# Altium PCB PCB1.PcbDoc (part 2 of 4)
Units mm, origin at the board's own origin, x right, y up, seen from the top; angles counter-clockwise.
Board outline 45.9 x 24.5 mm, 4 copper layers (Top Layer, Signal Layer 1, Signal Layer 2, Bottom Layer), stack 1.021 mm thick; 157 components, 126 nets, 564 pads, 199 vias.
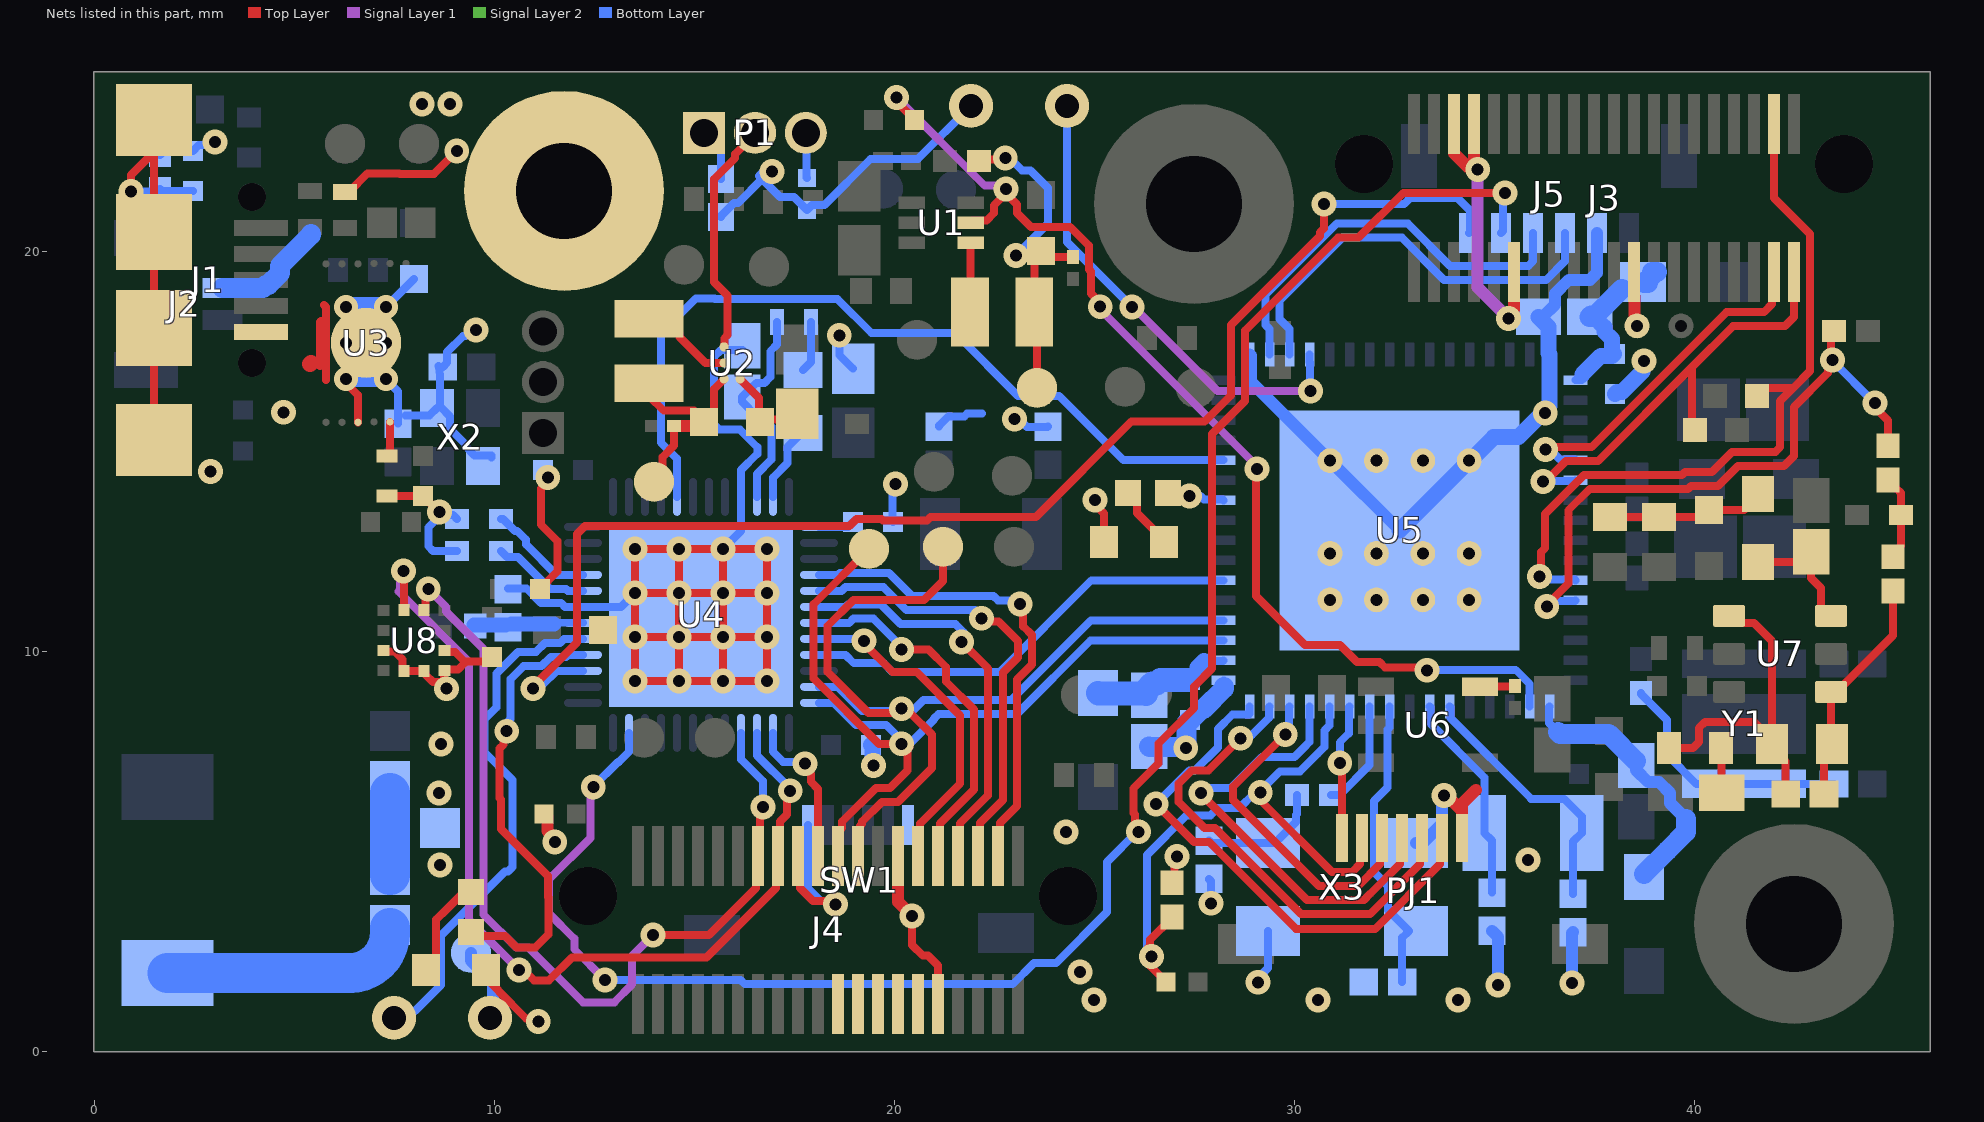
[diagram p4: the nets of this part, all layers, seen from the top]

## Part data (continued)
L3: "Inductor RF Chip Wirewound 10uH 10% 2.52MHz 0.38A 0.36Ohm DCR 0603 T/R", Case/Package=0603, DC Current=380mA, DC Resistance (DCR)=360mR, Inductance=10uH, Manufacturer=KEMET, Max DC Current=115mA, Max Operating Temperature=105°C, Min Operating Temperature=-25°C, Package Quantity=3000, Resistor Type=Ceramic, Self Resonant Frequency=32MHz, Supplier Part Number 1=3638979, Test Frequency=2.52MHz, Tolerance=10%, Category="Fixed Inductors", ComponentLink1Description=http://www.mouser.com/ds/2/212/F3115-1104303.pdf?src-supplier=Mouser, ComponentLink1URL=http://www.mouser.com/ds/2/212/F3115-1104303.pdf?src-supplier=Mouser, ComponentLink2Description=http://components.arrow.com/part/dataview/0323_00380344?src-supplier=Arrow+Europe, ComponentLink2URL=http://components.arrow.com/part/dataview/0323_00380344?src-supplier=Arrow+Europe, Depth=1mm, Height=0.8mm, Length=1.6mm, Manufacturer Part Number=L0603B100KDWFT, Military Standard=Not, Packaging="Tape and Reel", Pricing 1="5=0.45200, 50=0.25500, 250=0.24300, 500=0.20900, 1500=0.18400, 3000=0.15700, 15000=0.13700 (CHF)", RoHS=Yes, RoHS Compliant=Yes, Series=L-DWF, Shielding=Shielded, Stock 1=1725, Supplier 1=Farnell, Termination=SMD/SMT, Width=0.8mm
L4: library part CMP-2000-06595-2, "Wire Wound RF Inductor 15nH ±5% 460mA 0.16Ω 0402 (1005)", Case Code (Imperial)=0402, Case Code (Metric)=1005, Current Rating=460mA, DC Resistance (DCR)=160mR, Inductance=15nH, Max Operating Temperature=125°C, Min Operating Temperature=-55°C, Package Quantity=10000, Resistor Type=Wirewound, Self Resonant Frequency=5GHz, Test Frequency=100MHz, Tolerance=5%, Case/Package=0402, Core Material=Air, DC Current=460mA, Depth=0.7mm, Height=0.5mm, Lead Free="Lead Free", Length=1mm, Max DC Current=460mA, Military Standard=Not, Mount="Surface Mount", Packaging="Tape and Reel", Q Factor=30, Radiation Hardening=No, Shielding=Unshielded, Termination=SMD/SMT, Weight=2.8E-05oz, Width=0.02inch
L5: library part LQP15MN3N9B02D, "Inductor RF Chip Thin Film 3.9nH 0.1nH 500MHz 13Q-Factor 170mA 500mOhm DCR 0402 Paper T/R", Case Code (Imperial)=0402, Case Code (Metric)=1005, Current Rating=170mA, DC Resistance (DCR)=500mR, Inductance=3.9nH, Manufacturer=Murata, Max Operating Temperature=85°C, Min Operating Temperature=-40°C, Package Quantity=10000, Resistor Type="Thin Film", Self Resonant Frequency=6GHz, Supplier Part Number 1=490-1131-1-ND, Test Frequency=500MHz, Case/Package=0402, Category="Fixed Inductors", ComponentLink1Description=https://datasheet.ciiva.com/27054/1865137-27054329.pdf?src-supplier=Jameco, ComponentLink1URL=https://datasheet.ciiva.com/27054/1865137-27054329.pdf?src-supplier=Jameco, ComponentLink2Description=https://datasheet.ciiva.com/11799/0900766b80f155d9-11799807.pdf?src-supplier=RSComponents, ComponentLink2URL=https://datasheet.ciiva.com/11799/0900766b80f155d9-11799807.pdf?src-supplier=RSComponents, ComponentLink3Description=https://datasheet.ciiva.com/8510/l0075s0084lqp15m-8510329.pdf?src-supplier=Avnet, ComponentLink3URL=https://datasheet.ciiva.com/8510/l0075s0084lqp15m-8510329.pdf?src-supplier=Avnet, ComponentLink4Description=https://datasheet.ciiva.com/4976/product-4976732.pdf?src-supplier=Mouser, ComponentLink4URL=https://datasheet.ciiva.com/4976/product-4976732.pdf?src-supplier=Mouser, ComponentLink5Description=https://datasheet.ciiva.com/1039/l0075s0084lqp15m-1039837.pdf?src-supplier=Digi-Key, ComponentLink5URL=https://datasheet.ciiva.com/1039/l0075s0084lqp15m-1039837.pdf?src-supplier=Digi-Key, ComponentLink6Description=https://datasheet.ciiva.com/1039/l0075s0084lqp15m-1039838.pdf?src-supplier=Digi-Key, ComponentLink6URL=https://datasheet.ciiva.com/1039/l0075s0084lqp15m-1039838.pdf?src-supplier=Digi-Key, ComponentLink7Description=https://datasheet.ciiva.com/1039/l0075s0084lqp15m-1039839.pdf?src-supplier=Digi-Key, ComponentLink7URL=https://datasheet.ciiva.com/1039/l0075s0084lqp15m-1039839.pdf?src-supplier=Digi-Key, ComponentLink8Description=https://datasheet.ciiva.com/16362/l0075s0084lqp15m-16362181.pdf?src-supplier=Future+Electronics, ComponentLink8URL=https://datasheet.ciiva.com/16362/l0075s0084lqp15m-16362181.pdf?src-supplier=Future+Electronics, ComponentLink9Description=https://datasheet.ciiva.com/18230/getdatasheetpartid-153200-18230711.pdf?src-supplier=Verical, ComponentLink9URL=https://datasheet.ciiva.com/18230/getdatasheetpartid-153200-18230711.pdf?src-supplier=Verical, ComponentLink10Description=https://datasheet.ciiva.com/8510/l0075s0084lqp15m-8510975.pdf?src-supplier=Avnet, ComponentLink10URL=https://datasheet.ciiva.com/8510/l0075s0084lqp15m-8510975.pdf?src-supplier=Avnet, Core Material=Non-Magnetic, DC Current=170mA, Depth=0.6mm, Height=0.35mm, Height - Seated (Max)=0.018inch, Lead Free="Lead Free", Length=1.1mm, Manufacturer Part Number=LQP15MN3N9B02D, Max DC Current=170mA, Military Standard=Not, Mount="Surface Mount", Packaging="Tape and Reel", Pricing 1="1=0.18000, 10=0.15800, 25=0.14040, 50=0.11920, 100=0.10520, 250=0.09644, 500=0.08768, 1000=0.07365, 2500=0.06313 (USD)", Q Factor=13, Radiation Hardening=No, Rated Current-Max=170mA, RoHS=Yes, RoHS Compliant=Yes, Series=LQP15M, Shielding=Unshielded, Stock 1=22125, Supplier 1=Digi-Key, Technology="THIN FILM", Termination=SMD/SMT, Width=0.5mm
L6 L7: library part 725321dda6339637d4d059423bc1c3c, "Wire Wound RF Inductor 3.6nH ±2% 1950mA 0.03Ω 0402 (1005)"
L8 L9 L10 L11: library part CMP-0220-00032-1, "SMD EMI Suppression Ferrite Bead WE-CBF, Z = 600 Ohm", ComponentLink1Description="Manufacturer Link", ComponentLink1URL=http://www.we-online.com, ComponentLink2Description=Datasheet, ComponentLink2URL=http://www.we-online.de/katalog/media/pdf/742792040.pdf, DatasheetVersion=Dec-2005, Impedance="600 Ohm", PackageDescription="Chip Inductor, 2-Leads, Body 2.0 x 1.2 mm", PackageReference=SMD-0805, PackageVersion=2005
M1 M2 M4: library part CMP-00274-1, "M2 Hole, 2.4mm drill, 5mm landing pads, 3mm pad in middle layers, no overlay", ClassName="Mounting Hole"
NT1: library part Net_Tie
P1 P2: library part CMP-2000-06372-1, "Male Header, Pitch 1.27 mm, 1 x 3 Position, Height 4 mm, Tail Length 2.3 mm, -40 to 105 degC, RoHS, Bulk", Manufacturer=Sullins, Package Description="Male Header, Pitch 1.27 mm, 1 x 3 Position, Height 4 mm, Tail Length 2.3 mm", Standard Package=1, Catalog Drawings=S9014ESeriesTop, Category=Connectors,Interconnects, Connector Type=Header,Unshrouded, Contact Finish=Gold, Contact Finish Thickness=Flash, Contact Mating Length="0.118\"(3.00mm)", Contact Type=MalePin, Datasheet URL=http://www.sullinscorp.com/drawings/71_GRPB___1VWVN-RC,_10957-C.pdf, Datasheet Version="Rev. C, 12/2008", Dynamic Catalog=GRPB, Family=RectangularConnectors-Headers,MalePins, Manufacturer URL=http://www.sullinscorp.com/, Mating Products="S9010E-03-ND / -CONNHEADER.050\"3POSR/APCB / S9008E-03-ND / -CONNHEADER.050\"3POSPCBGOLD / S9005E-03-ND / -CONNHEADER.050\"3POSSMDGOLD", Mounting Technology=ThroughHole, Mounting Type=ThroughHole, Number of Positions=3, Number of Positions Loaded=All, Number of Rows=1, Other Names=S9014E-03, Package Reference=GRPB031VWVN-RC, Packaging=Bulk, Pitch="0.050\"(1.27mm)", Termination=Solder
PJ1: library part MOLEX_5051100892
R1 R5 R6 R8 R9 R10 R11 R13: library part CMP-26527-000038-1, "RES 0.1 OHM 1% 1/4W 0402", Case Code (Imperial)=0402, Case Code (Metric)=1005, Max Operating Temperature=155°C, Max Power Dissipation=250mW, Min Operating Temperature=-55°C, Package Quantity=1000, Resistance=0.1, Resistor Type="Thick Film", Temperature Coefficient=200ppm/°C, Tolerance=1%, Case/Package=0402, Height=0.017inch, Length=0.039inch, Mount="Surface Mount", Number of Terminations=2, Packaging="Tape and Reel", RoHS Compliant=Yes, Series=CSR, Width=0.02inch
R2 R19 R20: library part CMP-2002-05525-2, "Thick Film Chip Resistors 0402 1MΩ 0.0625W 5% 200ppm/°C", Case Code (Imperial)=0402, Case Code (Metric)=1005, Max Operating Temperature=125°C, Max Power Dissipation=63mW, Min Operating Temperature=-55°C, Package Quantity=10000, Power Rating=62.5mW, Resistance=1M, Temperature Coefficient=200ppm/°C, Tolerance=5%, Voltage Rating=50V, Case/Package=0402, Composition="Thick Film", Contact Plating=Tin, Depth=0.5mm, Height=0.016inch, Length=1mm, Military Standard=Not, Mount="Surface Mount", Number of Terminations=2, Packaging="Tape and Reel", Radiation Hardening=No, Termination=SMD/SMT, Thickness=356um, Width=0.02inch
R3: library part CMP-1011-00815-1, "499K 0.063W 1% 0402 (1005 Metric)  SMD", Case-EIA=0402, Case-Metric=1005, Power="0.063 W", Tolerance="1 %", Technology=SMT
R4: library part CMP-2002-07690-1, Manufacturer=Yageo, Resistance=453k, Part Number=RC0402FR-07453KL
R7: library part CMP-2000-06984-1, "Chip Resistor, 100 KOhm, +/- 1%, 63 mW, -55 to 155 degC, 0402 (1005 Metric), RoHS, Tape and Reel", Manufacturer=Stackpole-Electronics-Inc., Operating Temperature=-55°C~155°C, Package / Case=0402(1005Metric), Package Description="2-Pin Surface Mount Device, Body 1 x 0.5 mm", Package Reference=0402, Power (Watts)=0.063W,1/16W, Resistance (Ohms)=100k, Temperature Coefficient=±100ppm/°C, Tolerance=±1%, Category=Resistors, Composition=ThickFilm, Datasheet URL=https://www.seielect.com/Catalog/SEI-RMCF_RMCP.pdf, Datasheet Version=01/2017, Family=ChipResistor-SurfaceMount, Features=AutomotiveAEC-Q200, Manufacturer URL=https://www.seielect.com/, Mounting Technology=SurfaceMount, Number of Terminations=2, Packaging=CutTape(CT), Series=RMCF, Supplier Device Package=0402
R12: library part CMP-2002-08420-1, Manufacturer="Vishay Dale", Resistance=267k, Part Number=CRCW0402267KFKED
R14: library part CMP-2002-07364-1, Manufacturer="Yageo / Phycomp", Resistance=11.5k, Part Number=RC0402FR-0711K5L
R15 R33 R34: library part CMP-1011-00001-2, Manufacturer="Yageo / Phycomp", Resistance=0, Part Number=RC0402JR-070RL
R16 R17 R32: library part CMP-2002-01683-2, "RES 10K OHM 0.1% 1/10W 0402", Manufacturer=Vishay, Package=TNPW0402-e3, Power Rating=0.1W, Resistance=10kΩ, Temperature="-55°C to +155°C", Temperature Coefficient=25ppm/°C, Temperature Range High=+155°C, Temperature Range Low=-55°C, Tolerance=0.1%, Voltage Rating=50V, Automotive=Yes, Automotive Grade="Grade 0", Category=Res, ComponentLink2Description=Datasheet, ComponentLink2URL=http://www.vishay.com/docs/28758/tnpw_e3.pdf, Composition="Thin Film", Device Class L1="Passive Components", Device Class L2=Resistors, Device Class L3="Chip SMD Resistors", Digikey Description="RES 10K OHM 0.1% 1/10W 0402", Height=0.4mm, Ipc Land Pattern Name=RESC10050X35, Lead Free=Yes, Manufacturer Part Number=TNPW040210K0BEED, Octopart=https://octopart.com/tnpw040210k0beed-vishay-41229038, RoHS=TRUE, Series=TNPW
R18: library part CMP-26527-000102-1, "RES 0.01 OHM 1% 1/8W 0402", Case Code (Imperial)=0402, Case Code (Metric)=1005, Max Operating Temperature=170°C, Max Power Dissipation=125mW, Min Operating Temperature=-55°C, Package Quantity=1, Resistance=10m, Resistor Type="Metal Foil", Temperature Coefficient=200ppm/°C, Tolerance=1%, Case/Package=0402, Features="Moisture Resistant", Height=0.022inch, Lead Free="Lead Free", Length=0.039inch, Mount="Surface Mount", Number of Terminations=2, Packaging="Cut Tape", RoHS Compliant=Yes, Series=CSRF, Width=0.022inch
R21: library part CMP-2002-00608-4, "not mounted", Case Code (Imperial)=0402, Case Code (Metric)=1005, Max Operating Temperature=155°C, Max Power Dissipation=100mW, Min Operating Temperature=-55°C, Package Quantity=1, Resistance=NC, Temperature Coefficient=100ppm/°C, Tolerance=1%, Voltage Rating=50V, Case/Package=0402, Composition="Thick Film", Contact Plating=Tin, Depth=0.5mm, Features="Automotive AEC-Q200", Height=0.35mm, Lead Free="Lead Free", Length=1mm, Military Standard=Not, Mount="Surface Mount", Number of Pins=2, Number of Terminations=2, Packaging="Tape and Reel", Power Rating=100mW, Radiation Hardening=No, REACH SVHC="No SVHC", Termination=SMD/SMT, Voltage Rating (DC)=50V, Width=0.5mm
R23 R27: library part CMP-2002-03257-1, Manufacturer="TE Connectivity / AMP", Resistance=324, Part Number=CPF0402B324RE1
R24 R25: library part CMP-2002-08314-2, "RES Thick Film, 1MΩ, 1%, 0.063W, 100ppm/°C, 0402", Case Code (Imperial)=0402, Case Code (Metric)=1005, Max Operating Temperature=155°C, Max Power Dissipation=63mW, Min Operating Temperature=-55°C, Package Quantity=10, Resistance=1M, Temperature Coefficient=100ppm/°C, Tolerance=1%, Voltage Rating=50V, Case/Package=0402, Composition="Thick Film", Contact Plating=Tin, Depth=0.5mm, Features="Automotive AEC-Q200", Height=0.35mm, Lead Free="Lead Free", Length=1mm, Military Standard=Not, Number of Pins=2, Number of Terminations=2, Packaging="Tape and Reel", Power Rating=63mW, Radiation Hardening=No, Termination=SMD/SMT, Voltage Rating (DC)=50V, Weight=2.3E-05oz, Width=0.02inch
R26 R28: library part CMP-2002-07961-1, Manufacturer="Yageo / Phycomp", Resistance=22, Part Number=RC0402JR-0722RL
R29: library part CMP-02407-007705-1, "RES Thick Film, 47kΩ, 1%, 0.063W, 100ppm/°C, 0402", Case Code (Imperial)=0402, Case Code (Metric)=1005, Max Operating Temperature=155°C, Min Operating Temperature=-55°C, Package Quantity=10000, Power Rating=63mW, Resistance=47k, Temperature Coefficient=100ppm/°C, Tolerance=1%, Voltage Rating=50V, Case/Package=0402, Composition="Thick Film", Contact Plating=Tin, Depth=0.5mm, Height=0.35mm, Lead Free="Lead Free", Length=1mm, Military Standard=Not, Mount="Surface Mount", Number of Terminations=2, Packaging="Tape and Reel", Radiation Hardening=No, Termination=SMD/SMT, Voltage Rating (DC)=50V, Weight=2.3E-05oz, Width=0.5mm, Working Voltage=50V
R30: library part CMP-2000-04142-1, Manufacturer=Yageo, Resistance=806, Part Number=RC0603FR-07806RL
R31: library part CMP-2000-03938-1, Manufacturer=Yageo, Resistance=1.82k, Part Number=RC0603FR-071K82L
R35: library part CMP-2002-05495-2, "Thick Film Chip Resistors 0402 0Ω 0.0625W 5%", Case Code (Imperial)=0402, Case Code (Metric)=1005, Max Operating Temperature=125°C, Max Power Dissipation=63mW, Min Operating Temperature=-55°C, Package Quantity=10000, Power Rating=62.5mW, Resistance=0, Temperature Coefficient=500ppm/°C, Tolerance=5%, Voltage Rating=50V, Case/Package=0402, Composition="Thick Film", Contact Plating=Tin, Depth=0.5mm, Height=0.35mm, Length=1mm, Mount="Surface Mount", Number of Pins=2, Packaging="Tape and Reel", Radiation Hardening=No, REACH SVHC="No SVHC", Termination=SMD/SMT, Thickness=356um, Voltage Rating (DC)=50V, Width=0.5mm
R36: library part CMP-03412-013083-1, "RES SMD 24.9K OHM 1% 1/10W 0603", Approved Alternate Part Number=541-1.00HHCT-ND, Manufacturer=Yageo, Package=RC_L0603, Power=100mW, Power Rating=0.1W, Resistance=24.9k, Temperature="-55°C to +155°C", Temperature Coefficient=100ppm/°C, Temperature Range High=+155°C, Temperature Range Low=-55°C, Tolerance=1%, Voltage=75V, Automotive=No, Category=Res, ComponentLink2Description=Datasheet, ComponentLink2URL=https://www.yageo.com/upload/media/product/productsearch/datasheet/rchip/PYu-RC_Group_51_RoHS_L_10.pdf, Composition="Thick Film", Device Class L1="Passive Components", Device Class L2=Resistors, Device Class L3="Chip SMD Resistors", Digikey Description="RES SMD 24.9K OHM 1% 1/10W 0603", Footprint Url=https://www.yageo.com/upload/website/yageo_PYu-R_Mount_10_19050818_343.pdf, Height=0.55mm, Ipc Land Pattern Name=RESC16080X45, Lead Free=Yes, Manufacturer Part Number=RC0603FR-0724K9L, Mouser Description="Res Thick Film 1.6 x 0.8 mm 24.9K Ohm 1% 0.1W(1/10W) 100ppm/ C Molded SMD Paper T/R", Octopart=https://octopart.com/rc0603fr-0724k9l-yageo-1189838, RoHS=TRUE, Series=RC_L, Voltage Rating=75V
R37 R38: library part CMP-2000-00320-1, Manufacturer=YAEGO, Parameter 1=2M, Part Number=RC0603FR-072ML
R39: library part 1029c3af85768c4190bb7ad29bc67b5, "Thick Film Chip Resistors 0402 0Ω 0.0625W 5%", Case Code (Imperial)=0402, Case Code (Metric)=1005, Max Operating Temperature=125°C, Max Power Dissipation=63mW, Min Operating Temperature=-55°C, Package Quantity=10000, Power Rating=62.5mW, Resistance=0, Temperature Coefficient=500ppm/°C, Tolerance=5%, Voltage Rating=50V, Case/Package=0402, Composition="Thick Film", Contact Plating=Tin, Depth=0.5mm, Height=0.35mm, Length=1mm, Mount="Surface Mount", Number of Pins=2, Packaging="Tape and Reel", Radiation Hardening=No, REACH SVHC="No SVHC", Termination=SMD/SMT, Thickness=356um, Voltage Rating (DC)=50V, Width=0.5mm
S1 S2: "Switch", Manufacturer_Name=LITTELFUSE, Datasheet Link=https://www.ckswitches.com/media/2866/nanot.pdf, Height=1mm, Manufacturer_Part_Number=NanoT160BP
SW1: library part MOLEX_5051100692
TP1 TP2 TP3 TP4 TP5 TP6 TP7 TP8 TP9 TP10 TP11 TP12 TP13 TP14 TP15 TP16 TP17 TP18 TP19 TP20 TP21 TP22 TP23: library part CMP-0484-00002-1, "Test Point, Surface Mount, Circular, Pad Diameter 1 mm"
U1: "2.5V-5.5V input, 2-A high efficiency step-down buck converter in SOT23 and SOT563 package 6-SOT-5X3 -40 to 125", Manufacturer="Texas Instruments", Max Operating Temperature=125°C, Min Operating Temperature=-40°C, Supplier Part Number 1=296-50408-1-ND, Category="Voltage Regulators - Switching", ComponentLink1Description=http://www.ti.com/general/docs/suppproductinfo.tsp?distId=10&amp;gotoUrl=http%3A%2F%2Fwww.ti.com%2Flit%2Fgpn%2Ftlv62569&src-supplier=Digi-Key, ComponentLink1URL=http://www.ti.com/general/docs/suppproductinfo.tsp?distId=10&amp;gotoUrl=http%3A%2F%2Fwww.ti.com%2Flit%2Fgpn%2Ftlv62569&src-supplier=Digi-Key, ComponentLink2Description=http://www.ti.com/lit/ds/symlink/tlv62569.pdf?src-supplier=Digi-Key, ComponentLink2URL=http://www.ti.com/lit/ds/symlink/tlv62569.pdf?src-supplier=Digi-Key, Manufacturer Part Number=TLV62569PDRLR, Pricing 1="1=0.60000, 10=0.52500, 25=0.49280, 100=0.40230, 250=0.37364, 500=0.31800, 1000=0.26250 (USD)", RoHS=Yes, RoHS Compliant=Yes, Supplier 1=Digi-Key
U2: library part CMP-01223-1, "Switching Voltage Regulators 60-nA IQ, 1.8-V to 6.5-VIN, high-efficiency 750-mA step-down converter 6-DSBGA -40 to 125", Input Voltage="1.8 V to 6.5 V", Input Voltage MAX="6.5 V", Input Voltage MIN="1.8 V", Manufacturer="Texas Instruments", Maximum Operating Temperature="+ 125 C", Minimum Operating Temperature="- 40 C", Output Current="750 mA", Output Voltage="1.8 V to 3.3 V", Package/Case=DSBGA-6, Quiescent Current="60 nA", Switching Frequency="1.8 MHz", Brand="Texas Instruments", Factory Pack Quantity=3000, Mounting Style=SMD/SMT, Number Of Outputs="1 Output", Product Category="Switching Voltage Regulators", Product type="Switching Voltage Regulators", Series=TPS62840, Shutdown=Shutdown, Subcategory="PMIC - Power Management ICs", Supply Voltage - Min="1.8 V", Topology=Buck, Type="Step-Down Converter"
U3: "System-side Impedance Track™ battery fuel (gas) gauge 12-SON -40 to 85", Capacity=8000mAh, Manufacturer="Texas Instruments", Max Operating Temperature=85°C, Max Supply Voltage=4.5V, Min Operating Temperature=-40°C, Min Supply Voltage=2.45V, Operating Supply Current=93uA, Output Current=500uA, Output Voltage=1.8V, Package Quantity=250, Supplier Part Number 1=595-BQ27441DRZT-G1B, Category="Battery Management", ComponentLink1Description=https://datasheet.ciiva.com/46405/1795843-46405045.pdf?src-supplier=Element14, ComponentLink1URL=https://datasheet.ciiva.com/46405/1795843-46405045.pdf?src-supplier=Element14, Contact Plating=Gold, Interface=I2C, Lead Free="Lead Free", Manufacturer Part Number=BQ27441DRZT-G1B, Mount="Surface Mount", Number of Cells=1, Number of Pins=12, Packaging="Tape and Reel", Pricing 1="1=3.05000, 10=2.74000, 50=2.59000, 100=2.25000, 1000=2.12000, 10000=2.12000 (USD)", REACH SVHC="No SVHC", RoHS=Yes, RoHS Compliant=Yes, Stock 1=456, Supplier 1=Mouser
U4: library part CMP-2100-03661-1, "Multiprotocol Bluetooth Smart, ANT/ANT+ and Proprietary System-on-Chip, 2.4 GHz, 256 KB FLASH, 1.7 to 3.6 V, -40 to 85 degC, 48-Pin QFN, RoHS, Tape and Reel", Frequency=2.4GHz, Manufacturer="Nordic Semiconductor", Max Operating Temperature=85degC, Min Operating Temperature=-40degC, Package Description="48-Pin Quad Flat No-lead Package, Body 6 x 6 mm, Pitch 0.4 mm, Thermal Pad 4.6 x 4.6 mm", Package Reference=QF-48, Datasheet URL=http://infocenter.nordicsemi.com/pdf/nRF52832_PS_v1.0.pdf, Datasheet Version="Rev. 1.0, 02/2016", Lead Free=LeadFree, Manufacturer URL=http://www.nordicsemi.com/eng/Products/, Max Frequency=2.4GHz, Mount=SurfaceMount, Packaging=TapeandReel, RoHSCompliant=true
U5: "No Description Available", Mfr_Name="Texas Instruments", Copyright="Copyright (C) 2021 Ultra Librarian. All rights reserved.", Manufacturer_Part_Number=MSP430FR5043IRGCT, RefDes=RefDes, Type=DEV
U6: "No Description Available", Mfr_Name="Torex Semiconductor", Copyright="Copyright (C) 2021 Ultra Librarian. All rights reserved.", Manufacturer_Part_Number=XC8102AA01MR-G, RefDes=RefDes, Type=DEV
U7: library part CMP-0018-00480-2, "Very Low Power, Rail to Rail Out, Negative Rail In, VFB Operational Amplifier, 2.5 to 5.5 V, -40 to 125 degC, 6-pin SOT23 (DBV6), Green (RoHS & no Sb/Br)", Manufacturer="Texas Instruments", 2nd Harmonic(dBc)=85, 3rd Harmonic(dBc)=105, @ MHz=1, Acl, min stable gain(V/V)=1, BW @ Acl(MHz)=205, Code_JEDEC=MO-178, ComponentLink1Description="Manufacturer URL", ComponentLink1URL=http://www.ti.com/, ComponentLink2Description=Datasheet, ComponentLink2URL=http://www.ti.com/general/docs/lit/getliterature.tsp?genericPartNumber=OPA836&fileType=pdf, ComponentLink3Description="Package Specification", ComponentLink3URL=http://www.ti.com/litv/pdf/mpds026h, DatasheetVersion=SLOS712D, Eco-Plan="Green (RoHS & no Sb/Br)", Iib(Max)(nA)=1000, Io(Typ)(mA)=50, Iq per channel(Max)(mA)=1, Mounting Technology="Surface Mount", Number of Channels=1, PackageDescription="6-Pin Plastic Small Outline, Body 1.6 x 2.9 mm, Pitch 0.95 mm", PackageReference=DBV0006A, PackageVersion="4073253-5/K, 03/2006", PartNumber=OPA836IDBVT, Settling Time (0.1%)(Typ)(ns)=30, Slew Rate(Typ)(V/us)=560, Sub Family="Audio Operational Amplifier, High Output Current Amplifier (>=50mA), High Speed Amplifier (>=50MHz), Low Noise Amp (<=10nV/rtHz), Low Offset Voltage Amplifier (<=500uV), Low Supply Voltage Amplifier (<=2.7V)", Vio(Max)(mV)=0.4, Vn at Flatband(Typ)(nV/rtHz)=4.6, Vs(Max)(V)=5.5, Vs(Min)(V)=2.5
U8: library part CMP-12175-000008-1, "ACCEL 2-16G I2C/SPI 12LGA", Manufacturer=STMicroelectronics, Max Supply Voltage=3.7V, Min Supply Voltage=1.71V, Operating Supply Current=2-11uA, Package=LGA-12-8365767, Temperature="-40°C to +85°C", Temperature Range High=+85°C, Temperature Range Low=-40°C, Accel Axis="X+Y and Z", Accel Range=2/4/8/16g, Automotive=No, Category=IC, ComponentLink2Description=Datasheet, ComponentLink2URL=https://www.st.com/content/ccc/resource/technical/document/datasheet/group1/35/6d/04/26/27/5c/4d/7c/DM00171283/files/DM00171283.pdf/jcr:content/translations/en.DM00171283.pdf, Device Class L1=Sensors, Device Class L2="Motion Sensors", Device Class L3=Accelerometers, Digikey Description="ACCEL 2-16G I2C/SPI 12LGA", Height=1mm, Lead Free=Yes, Manufacturer Part Number=IIS2DHTR, Octopart=https://octopart.com/iis2dhtr-stmicroelectronics-58218805, RoHS=TRUE, Sensor Output=I2C,SPI
X1: library part Crys_Abracon_ABS07AIG-32_768KHZ-9-1-T_eec, "Crystal", Part Nr=ABS07AIG-32.768KHZ-9-1-T
X2: library part Crys_Seiko_Epson_Corporation_FA-128_32.0000MF10Z-AJ3_eec, "Crystal", Part Nr="FA-128 32.0000MF10Z-AJ3"
X3: "Crystal 8MHz ±30ppm (Tol) ±30ppm (Stability) 18pF FUND 100Ohm 4-Pin SMD T/R", Case/Package=SMD/SMT, ESR (Equivalent Series Resistance)=100R, Frequency=8MHz, Frequency Stability=30ppm, Load Capacitance=18pF, Manufacturer=Diodes, Max Operating Temperature=85°C, Min Operating Temperature=-40°C, Supplier Part Number 1=FY0800018CT-ND, Category=Crystals, ComponentLink1Description=http://media.digikey.com/pdf/Data%20Sheets/Pericom%20PDFs/FY0800018_VerB.pdf?src-supplier=Digi-Key, ComponentLink1URL=http://media.digikey.com/pdf/Data%20Sheets/Pericom%20PDFs/FY0800018_VerB.pdf?src-supplier=Digi-Key, Frequency Tolerance=30ppm, Height=0.043inch, Length=0.197inch, Manufacturer Part Number=FY0800018, Mount="Surface Mount", Packaging="Cut Tape", Pricing 1="1=0.80000, 10=0.70800, 50=0.66220, 100=0.58520, 500=0.55440 (USD)", RoHS=Yes, Stock 1=10869, Supplier 1=Digi-Key, Width=0.126inch
X4: "Crystal; Miniature; 3.2 x 1.5 x 0.9mm; 32.768KHZ; 9pf; 20ppm -40+85C; SMD; T/R", Case/Package=CSMD, ESR (Equivalent Series Resistance)=70kR, Frequency=32.768kHz, Frequency Stability=20ppm, Insulation Resistance=500MR, Load Capacitance=9pF, Manufacturer=Abracon, Max Operating Temperature=85°C, Min Operating Temperature=-40°C, Operating Frequency="32.768 kHz", Package Quantity=3000, Supplier Part Number 1=535-9544-1-ND, Category=Crystals, ComponentLink1Description=https://datasheet.ciiva.com/855/abs07-855948.pdf?src-supplier=Digi-Key, ComponentLink1URL=https://datasheet.ciiva.com/855/abs07-855948.pdf?src-supplier=Digi-Key, Depth=1.5mm, Frequency Tolerance=20ppm, Height=0.035inch, Lead Free="Lead Free", Length=3.2mm, Manufacturer Part Number=ABS07-32.768KHZ-9-T, Mount="Surface Mount", Number of Pins=2, Packaging="Tape and Reel", Pricing 1="1=1.36000, 10=1.30000, 50=1.27000, 100=1.08860, 500=1.05840, 1000=0.89208 (USD)", Radiation Hardening=No, REACH SVHC="No SVHC", RoHS=Yes, RoHS Compliant=Yes, Series=ABS07, Series Resistance=70kR, Stock 1=83876, Supplier 1=Digi-Key, Termination=SMD/SMT, Tolerance=20ppm, Width=1.5mm
Y1: "No Description Available", Frequency=8MHz, Mfr_Name=Abracon, Copyright="Copyright (C) 2021 Ultra Librarian. All rights reserved.", Manufacturer_Part_Number=AWSCR-8.00CV-T, RefDes=RefDes, Type=DEV

## Via types
v1: diameter 0.62, hole 0.3, Top Layer to Bottom Layer, tented both sides, 176 vias
v2: diameter 0.62, hole 0.3, Top Layer to Bottom Layer, 17 vias
v3: diameter 0.6, hole 0.3, Top Layer to Bottom Layer, 6 vias

## Nets (pads, with @x,y where several pads share a name; then routed paths per layer and width w, separated by ;. In a path a pad name is that pad's centre, name@x,y a point inside that pad or via, vN(x,y) a via of type N, cw(c..) or ccw(c..) an arc to the next point about the centre after c; other vN are vias at no path point)
ACC1_INT1: J4.15 U4.15 U8.12 | length 24.1
  Top Layer w0.2: v1(7.735,12.025) 7.75,12.01 U8.12@7.75,11.05 ; v1(10.625,2.05) 10.739,2.05 10.999,1.79 11.377,1.79 11.947,2.36 15.314,2.36 17.05,4.096 17.05,4.85 17.15,4.95 17.15,5.762 17.324,5.936 17.324,6.447 v1(17.404,6.527)
  Signal Layer 1 w0.2: v1(7.735,12.025) 7.655,11.945 7.655,11.56 7.61,11.515 9.375,9.75 9.375,3.3 v1(10.625,2.05)
  Bottom Layer w0.2: U4.15@16.575,7.975 16.575,7.41 17.404,6.581 v1(17.404,6.527)
ACC1_INT2: J4.13 U4.16 U8.11 | length 22.8
  Top Layer w0.2: U8.11@8.25,11.05 8.29,11.09 8.29,11.504 v1(8.357,11.571) ; v1(13.975,2.92) 15.374,2.92 16.55,4.096 16.55,4.85 16.65,4.95 16.65,6.051 v1(16.723,6.124)
  Signal Layer 1 w0.2: v1(8.357,11.571) 8.801,11.127 8.801,11.012 9.74,10.073 9.74,3.43 10.56,2.61 10.857,2.61 12.227,1.24 13.007,1.24 13.451,1.684 13.451,2.396 v1(13.975,2.92)
  Bottom Layer w0.2: U4.16@16.175,7.975 16.175,7.315 16.723,6.767 v1(16.723,6.124)
ANT: C17.1 L5.1 U4.30 | length 3.9
  Bottom Layer w0.184: C17.1@10.286,10.675 C17.1@10.35,10.611 10.439,10.7 C17.1@10.464,10.725
  Bottom Layer w0.193: C17.1@10.464,10.725 U4.30@12.225,10.725
  Bottom Layer w0.372: L5.1@9.5,10.675 C17.1@10.286,10.675 ; C17.1@10.439,10.7 11.5,10.7
AVCC1: C24.1 C27.2 L8.2 U5.1 | length 6.9
  Bottom Layer w0.2: U5.1@36.39,8.64 36.375,8.625 36.375,8.225 36.6,8
  Bottom Layer w0.3: C24.1@38.55,7.156 38.55,7.047 38.856,6.741 39.13,6.741 39.401,6.47 39.401,6.22 39.8,5.821 ; L8.2@38.75,4.375 L8.2@38.75,4.45 ; 39.337,5.037 39.364,5.037
  Bottom Layer w0.5: 36.6,8 36.65,7.95 C27.2@37.125,7.95 37.866,7.95 C24.1@38.55,7.266 ; L8.2@38.75,4.45 39.337,5.037 39.8,5.5 39.8,5.821
Button_MSP: S2.1 U5.36 | length 12
  Signal Layer 1 w0.2: v1(25.95,18.625) 25.987,18.625 28.087,16.525 v1(30.41,16.525)
  Bottom Layer w0.2: S2.1@24.325,23.65 24.325,20.25 25.3,19.275 ; 25.3,19.275 v1@25.95,18.625 ; U5.36@30.39,17.44 30.39,17.25 30.4,17.24 30.4,16.535 v1(30.41,16.525)
Button_NRF: S1.1 U4.29 | length 13
  Bottom Layer w0.2: S1.1@7.5,0.85 7.672,1.022 8.022,1.022 8.675,1.675 8.675,2.907 10.275,4.506 10.348,4.506 10.465,4.624 10.465,6.793 9.757,7.501 9.757,8.307 10.063,8.613 10.063,9.462 10.596,9.995 11.045,9.995 11.275,10.225 11.655,10.225 11.755,10.325 U4.29@12.225,10.325
CH0_IN: C44.2 R33.1 U5.60 | length 15.9
  Top Layer w0.2: v1(36.32,11.133) 36.32,11.17 36.858,11.708 36.858,13.538 37.395,14.075 39.846,14.075 39.921,14.15 40.596,14.15 41.096,14.65 42.25,14.65 42.5,14.9 42.5,16.125 43.345,16.97 43.345,17.185 v1(43.46,17.3) ; v1@43.425,17.3 43.425,17.95 R33.1@43.5,18.025 ; v1(44.525,16.225) 44.525,16.111 44.85,15.786 C44.2@44.85,15.154
  Bottom Layer w0.2: v1(36.32,11.133) 36.434,11.133 36.571,11.27 37.02,11.27 U5.60@37.04,11.29 ; v1(43.46,17.3) 43.46,17.278 44.512,16.225 v1(44.525,16.225)
CH0_OUT: J3.37 R25.1 U5.59 | length 18.9
  Top Layer w0.2: v1(36.14,11.881) 36.177,11.918 36.177,12.491 36.277,12.591 36.277,13.452 36.298,13.473 37.25,14.425 39.701,14.425 39.776,14.5 40.451,14.5 40.951,15 42.033,15 42.15,15.117 42.15,16.27 42.48,16.6 ; R25.1@41.575,16.4 41.775,16.6 42.48,16.6 ; J3.37@42,23.2 42,21.35 42.9,20.45 42.9,17.02 42.48,16.6
  Bottom Layer w0.2: v1(36.14,11.881) 36.212,11.81 37.02,11.81 U5.59@37.04,11.79
CH1_IN: J3.38 U5.53 | length 8.9
  Top Layer w0.2: v1(36.289,15.056) 36.358,15.125 37.442,15.125 40.817,18.5 41.754,18.5 41.95,18.696 41.95,19.45 J3.38@42,19.5
  Bottom Layer w0.2: v1(36.289,15.056) 36.408,15.056 36.653,14.81 37.02,14.81 U5.53@37.04,14.79
CH1_OUT: J3.40 R24.1 U5.54 | length 11.5
  Top Layer w0.2: v1(36.225,14.26) 36.285,14.26 36.8,14.775 37.604,14.775 39.938,17.109 40.979,18.15 42.275,18.15 42.5,18.375 J3.40@42.5,19.5 ; 39.95,17.098 39.95,15.625 R24.1@40.025,15.55
  Bottom Layer w0.2: v1(36.225,14.26) 36.235,14.27 37.02,14.27 U5.54@37.04,14.29
CS_MSP430: U4.9 U5.22 | length 11.2
  Bottom Layer w0.2: U4.9@18.125,9.925 18.785,9.925 18.994,9.715 19.745,9.715 19.961,9.5 22.643,9.5 24.932,11.79 U5.22@28.24,11.79
CS_WOLF: J4.19 U4.14 | length 3.8
  Top Layer w0.2: v1(17.771,7.204) 17.771,7.091 17.921,6.941 17.921,6.754 18.1,6.575 J4.19@18.1,4.9
  Bottom Layer w0.2: U4.14@16.975,7.975 16.975,7.505 17.23,7.25 17.726,7.25 v1(17.771,7.204)
DataReady: U4.41 U5.28 | length 20.4
  Bottom Layer w0.2: U4.41@14.575,13.875 14.575,14.83 14.175,15.23 14.175,17.967 15.044,18.836 15.508,18.836 15.519,18.825 18.583,18.825 19.442,17.966 21.534,17.966 23.1,16.4 24.13,16.4 24.6,15.93 25.739,14.79 U5.28@28.24,14.79
DCC: L3.1 U4.47 | length 1.9
  Bottom Layer w0.2: U4.47@16.975,13.875 16.975,14.354 17.34,14.719 17.34,15.125 17.69,15.475 L3.1@17.725,15.475
DEC1: C10.1 U4.1 | length 0.9
  Bottom Layer w0.2: U4.1@18.125,13.125 18.85,13.125 C10.1@18.975,13.25
DEC2: C11.2 U4.32 | length 2.5
  Bottom Layer w0.2: C11.2@10.175,12.525 10.325,12.375 10.6,12.375 11.4,11.575 11.8,11.575 11.85,11.525 U4.32@12.225,11.525
DEC3: C12.2 U4.33 | length 2.7
  Bottom Layer w0.2: C12.2@10.175,13.325 10.225,13.325 10.525,13.025 10.579,13.025 10.8,12.804 10.8,12.69 11.565,11.925 U4.33@12.225,11.925
DEC4: C13.2 L4.2 U4.46 | length 5.4
  Bottom Layer w0.2: U4.46@16.575,13.875 16.575,14.449 16.933,14.807 16.933,15.636 16.666,15.903 16.556,15.903 16.2,16.259 C13.2@16.2,16.369 16.556,16.725 16.76,16.725 16.906,16.871 16.906,17.515 17.075,17.684 L4.2@17.075,18.25
DVCC1: C25.1 C28.2 L9.2 U5.18 | length 3.6
  Bottom Layer w0.2: 27.75,9.775 28.226,9.775 U5.18@28.24,9.789
  Bottom Layer w0.4: C28.2@27.4,9.3 27.59,9.49 27.59,9.615 27.75,9.775
  Bottom Layer w0.6: L9.2@25.1,8.975 25.117,8.958 26.283,8.958 26.3,8.941 26.3,9.05 26.456,9.206 26.566,9.206 26.659,9.3 C28.2@27.4,9.3
DVCC3: C26.1 C29.2 L10.2 U5.49 | length 4.2
  Bottom Layer w0.2: U5.49@37.04,16.791 37.187,16.791 37.207,16.811 37.207,16.938
  Bottom Layer w0.4: 37.207,16.938 37.669,17.4 37.95,17.4 38,17.45 37.95,17.5 37.95,17.816 37.756,18.009 37.756,18.119 C26.1@37.5,18.375
  Bottom Layer w0.5: C26.1@37.42,18.405 C26.1@37.391,18.375 37.5,18.375 L10.2@38.2,19.075 ; L10.2@38.725,19.25 38.75,19.225 38.85,19.225 38.85,19.3 L10.2@39.05,19.5 ; L10.2@38.95,19.5 L10.2@39.05,19.5 ; L10.2@39.075,19.5 L10.2@39.05,19.5
EN_HV: R2.1 U1.5 U5.2 | length 27.4
  Top Layer w0.2: v1(20.063,23.862) 20.063,23.762 20.45,23.375 R2.1@20.45,23.325 ; U1.5@21.915,20.725 21.97,20.78 22.309,20.78 22.495,20.966 22.495,21.156 v1@22.8,21.461 ; v1(22.8,21.575) v1@22.8,21.461 ; v1(25.154,18.629) 25.154,18.727 24.925,18.956 24.925,19.511 24.875,19.561 24.875,20.154 24.404,20.625 23.421,20.625 23.075,20.971 23.075,21.186 v1@22.8,21.461 ; v1(29.075,14.575) 29.05,14.55 29.05,11.4 30.275,10.175 31.147,10.175 31.572,9.75 32.134,9.75 32.281,9.604 33.263,9.604 v1(33.327,9.54)
  Signal Layer 1 w0.2: v1(20.063,23.862) 22.27,21.655 22.72,21.655 v1(22.8,21.575) ; v1(25.154,18.629) 25.154,18.562 29.075,14.642 v1(29.075,14.575)
  Bottom Layer w0.2: v1(33.327,9.54) 33.337,9.55 35.541,9.55 35.89,9.201 U5.2@35.89,8.64
ExtraConn_MSP_P5.0: J5.3 U5.34 | length 10.1
  Bottom Layer w0.2: U5.34@29.39,17.44 29.39,18.073 29.29,18.173 29.29,18.927 31.07,20.707 32.843,20.707 33.9,19.65 35.858,19.65 35.975,19.767 J5.3@35.975,20.475
ExtraConn_MSP_P5.1: J5.4 U5.35 | length 10.6
  Bottom Layer w0.2: U5.35@29.89,17.44 29.89,18.068 29.64,18.318 29.64,18.782 31.215,20.357 32.693,20.357 33.75,19.3 36.304,19.3 36.775,19.771 J5.4@36.775,20.475
ExtraConn_NRF_P0.20: J5.2 U4.23 | length 46
  Top Layer w0.2: v1(26.11,5.502) 26.03,5.582 26.03,5.928 25.99,5.968 25.99,6.59 26.606,7.206 26.606,7.703 27.503,8.6 27.503,9.135 27.95,9.581 27.95,15.444 28.775,16.269 28.775,18.028 31.103,20.357 31.613,20.357 32.732,21.475 v1(35.275,21.475)
  Signal Layer 1 w0.2: v1(12.481,6.623) 12.41,6.552 12.41,5.348 11.375,4.313 11.375,3.462 12.007,2.829 12.007,2.568 v1(12.775,1.8)
  Bottom Layer w0.2: v1(12.481,6.623) 12.481,6.631 13.1,7.25 13.12,7.25 13.375,7.505 U4.23@13.375,7.975 ; v1(12.775,1.8) 16.16,1.8 16.268,1.692 22.968,1.692 23.501,2.225 24.054,2.225 25.325,3.496 25.325,4.75 26.077,5.502 v1(26.11,5.502) ; J5.2@35.175,20.475 35.225,20.525 35.225,21.425 v1(35.275,21.475)
ExtraConn_NRF_P0.22: J5.1 U4.27 | length 33.7
  Top Layer w0.2: v1(10.973,9.085) 10.973,9.135 12.075,10.237 12.075,12.95 12.275,13.15 18.889,13.15 19.064,13.325 19.686,13.325 19.725,13.285 20.825,13.285 20.914,13.375 23.55,13.375 25.932,15.757 27.768,15.757 28.425,16.414 28.425,18.173 30.651,20.399 30.651,20.49 30.75,20.589 v1(30.75,21.2)
  Bottom Layer w0.2: v1(10.973,9.085) 11.053,9.165 11.205,9.165 11.565,9.525 U4.27@12.225,9.525 ; v1(30.75,21.2) 32.755,21.2 32.9,21.345 34.088,21.345 34.4,21.033 34.4,20.5 J5.1@34.375,20.475
GND: C3.2 C4.2 C5.1 C6.1 C7.2 C8.2 C9.2 C10.2 C11.1 C12.1 C13.1 C14.2 C15.2 C16.2 C17.2 C18.2 C19.1 C20.1 C21.2 C25.2 C26.2 C28.1 C29.1 C32.1 C34.1 C35.2 C37.1 C38.1 C49.2 C50.2 C51.2 D1.1 D2.1 J1.5 J2.2 J3.05 J3.07 J3.12 J3.24 J4.17 J4.22 J4.24 J4.26 J4.27 J4.28 J4.30 J4.32 J5.5 L7.2 M1.1 NT1.2 PJ1.2 R12.1 R14.1 R15.2 R17.1 R21.2 S1.2 S2.2 SW1.1 SW1.6 TP23.1 U2.A1 U3.3 U3.13 U4.31 U4.45 U4.49 U5.17 U5.33 U5.48 U5.65 U8.3 U8.5 U8.6 U8.7 U8.8 X2.2 X2.4 X3.2 X3.4 | length 192.1
  Top Layer w0.2: 5.65,17.15 5.65,18.25 5.675,18.275 ; 5.75,18.675 5.8,18.625 5.8,16.8 ; R17.1@6.275,21.5 6.375,21.5 6.84,21.965 7.63,21.965 7.645,21.95 8.495,21.95 v1(9.069,22.523) ; v3(6.3,16.825) 6.3,16.717 6.6,16.417 U3.3@6.6,15.74 ; U8.3@7.237,10.038 7.271,10.004 7.521,10.004 7.717,9.808 7.717,9.558 U8.5@7.75,9.525 U8.6@8.25,9.525 8.29,9.485 8.29,9.43 8.475,9.245 v1@8.755,9.245 ; C6.1@7.325,13.9 C7.2@8.225,13.9 8.625,13.5 v1(8.635,13.5) ; U8.8@8.762,10.038 8.802,9.998 9.019,9.998 9.051,9.966 9.055,9.966 9.282,9.739 ; v1(8.815,9.08) 8.755,9.14 v1@8.755,9.245 ; D1.1@9.6,2.1 9.6,2.05 10.115,1.535 10.115,1.518 10.795,0.838 11.028,0.838 v1(11.108,0.758) ; C49.2@9.95,9.875 9.83,9.755 9.282,9.755 9.282,9.739 ; C51.2@11.15,11.575 11.583,12.008 11.583,12.774 11.177,13.18 11.177,14.079 11.345,14.246 v1(11.345,14.36) ; U2.A1@16.15,16.825 16.625,16.35 16.625,15.775 C4.2@16.65,15.75 ; C4.2@16.65,15.7 16.755,15.805 17.325,15.805 C3.2@17.575,16.055 ; J4.17@17.6,4.9 17.65,4.85 17.65,4.096 17.976,3.77 18.46,3.77 v1(18.54,3.69) ; v1(20.45,3.4) 20.45,2.675 20.719,2.406 20.852,2.406 21.1,2.158 J4.32@21.1,1.2 ; v1(25.025,13.8) 25.025,13.686 25.25,13.461 D2.1@25.25,12.75 ; C35.2@26.95,4.229 27.012,4.291 27.012,4.821 v1(27.075,4.883) ; v1@8.755,9.245 8.755,9.53 8.787,9.563 9.105,9.563 9.282,9.739 ; v2(13.525,10.375) v2(14.625,10.375) ; v2(13.525,10.375) v2(13.525,11.475) ; v2(13.525,10.375) v2(13.525,9.275) v2(14.625,9.275) ; v2(13.525,11.475) v2(14.625,11.475) ; v2(13.525,11.475) v2(13.525,12.575) v2(14.625,12.575) ; v2(14.625,9.275) v2(14.625,10.375) ; v2(14.625,9.275) v2(15.725,9.275) ; v2(14.625,10.375) v2(15.725,10.375) ; v2(14.625,10.375) v2(14.625,11.475) ; v2(14.625,11.475) v2(15.725,11.475) ; v2(14.625,11.475) v2(14.625,12.575) ; v2(14.625,12.575) v2(15.725,12.575) ; v2(15.725,9.275) v2(15.725,10.375) ; v2(15.725,9.275) v2(16.825,9.275) v2(16.825,10.375) ; v2(15.725,10.375) v2(15.725,11.475) ; v2(15.725,10.375) v2(16.825,10.375) ; v2(15.725,11.475) v2(15.725,12.575) ; v2(15.725,11.475) v2(16.825,11.475) ; v2(15.725,12.575) v2(16.825,12.575) v2(16.825,11.475) ; v2(16.825,10.375) v2(16.825,11.475)
  Top Layer w0.3: R21.2@11.25,5.95 11.334,5.866 11.334,5.523 11.52,5.337 v1(11.52,5.25) ; J4.27@20.1,4.9 20.1,3.75 v1(20.45,3.4) ; v1(33.75,6.41) 33.814,6.41 34.2,6.024 ; J3.05@34,23.2 34,22.462 34.339,22.123 34.53,22.123 v1(34.591,22.062) ; PJ1.2@34.2,5.35 34.2,6.024 ; J3.07@34.5,23.2 34.5,22.239 34.559,22.181 v1@34.559,22.094 ; 34.55,6.55 34.2,6.2 34.2,6.024 ; v1(35.365,18.335) 35.365,18.422 35.5,18.556 J3.12@35.5,19.5 ; J3.24@38.5,19.5 38.5,18.9 38.514,18.886 38.514,18.211 NT1.2@38.575,18.15
  Top Layer w0.4: 5.4,17.2 5.425,17.225
  Signal Layer 1 w0.2: v2(13.525,10.375) v2(14.625,10.375) ; v2(13.525,10.375) v2(13.525,11.475) ; v2(13.525,10.375) v2(13.525,9.275) v2(14.625,9.275) ; v2(13.525,11.475) v2(14.625,11.475) ; v2(13.525,11.475) v2(13.525,12.575) v2(14.625,12.575) ; v2(14.625,9.275) v2(15.725,9.275) ; v2(14.625,9.275) v2(14.625,10.375) ; v2(14.625,10.375) v2(15.725,10.375) ; v2(14.625,10.375) v2(14.625,11.475) ; v2(14.625,11.475) v2(15.725,11.475) ; v2(14.625,11.475) v2(14.625,12.575) ; v2(14.625,12.575) v2(15.725,12.575) ; v2(15.725,9.275) v2(16.825,9.275) v2(16.825,10.375) ; v2(15.725,9.275) v2(15.725,10.375) ; v2(15.725,10.375) v2(16.825,10.375) ; v2(15.725,10.375) v2(15.725,11.475) ; v2(15.725,11.475) v2(16.825,11.475) ; v2(15.725,11.475) v2(15.725,12.575) ; v2(15.725,12.575) v2(16.825,12.575) v2(16.825,11.475) ; v2(16.825,10.375) v2(16.825,11.475)
  Signal Layer 1 w0.3: v1(34.591,22.062) 34.591,19.109 v1(35.365,18.335)
  Signal Layer 2 w0.2: v2(13.525,10.375) v2(13.525,11.475) ; v2(13.525,10.375) v2(13.525,9.275) v2(14.625,9.275) ; v2(13.525,10.375) v2(14.625,10.375) ; v2(13.525,11.475) v2(13.525,12.575) v2(14.625,12.575) ; v2(13.525,11.475) v2(14.625,11.475) ; v2(14.625,9.275) v2(15.725,9.275) ; v2(14.625,9.275) v2(14.625,10.375) ; v2(14.625,10.375) v2(15.725,10.375) ; v2(14.625,10.375) v2(14.625,11.475) ; v2(14.625,11.475) v2(15.725,11.475) ; v2(14.625,11.475) v2(14.625,12.575) ; v2(14.625,12.575) v2(15.725,12.575) ; v2(15.725,9.275) v2(16.825,9.275) v2(16.825,10.375) ; v2(15.725,9.275) v2(15.725,10.375) ; v2(15.725,10.375) v2(15.725,11.475) ; v2(15.725,10.375) v2(16.825,10.375) ; v2(15.725,11.475) v2(16.825,11.475) ; v2(15.725,11.475) v2(15.725,12.575) ; v2(15.725,12.575) v2(16.825,12.575) v2(16.825,11.475) ; v2(16.825,10.375) v2(16.825,11.475)
  Bottom Layer w0.2: R15.2@1.65,22.425 1.75,22.525 C5.1@2.475,22.525 2.62,22.67 2.945,22.67 v1(3.025,22.75) ; v3(7.3,16.825) 7.3,16.808 7.6,16.508 C21.2@7.6,15.704 ; v3(7.3,18.625) C8.2@8,19.325 ; C21.2@7.789,15.914 8.389,15.914 X2.2@8.575,16.1 ; C18.2@8.618,17.15 8.622,17.113 8.647,16.914 X2.2@8.647,16.151 ; v1@8.625,13.5 8.705,13.42 8.98,13.42 C12.1@9.075,13.325 ; v1(8.635,13.5) 8.635,13.386 8.358,13.109 8.358,12.642 8.475,12.525 C11.1@9.075,12.525 ; X2.2@8.654,16.131 8.9,15.885 8.9,15.579 9.291,15.187 9.291,15.142 9.4,15.034 9.4,15.025 9.513,14.913 9.938,14.913 X2.4@9.938,14.863 ; C18.2@8.721,17.125 8.825,17.229 8.825,17.496 9.229,17.9 9.286,17.9 9.436,18.05 v1(9.55,18.05) ; C17.2@10.35,11.579 10.816,11.579 11.176,11.219 11.679,11.219 11.773,11.125 13.175,11.125 v2(13.525,11.475) ; v1@11.062,0.804 v1(11.108,0.758) ; R14.1@15.675,20.875 15.675,20.9 16,21.225 16.104,21.225 16.702,21.823 ; v2(15.725,12.575) 16.175,13.025 U4.45@16.175,13.875 16.175,14.544 16.583,14.952 16.583,15.117 16.147,15.553 15.64,15.553 15.494,15.7 15.494,17.369 15.675,17.55 C13.1@16.209,17.55 ; v1(16.953,22.01) v1@16.889,22.01 ; SW1.1@17.85,5.675 17.85,4.088 18.163,3.775 18.341,3.775 18.426,3.69 v1(18.54,3.69) ; v1(18.633,17.914) 18.633,17.422 C14.2@18.975,17.079 ; C10.2@19.975,13.25 19.963,13.262 19.963,14.12 v1(20.038,14.195) ; C19.1@21.125,15.632 21.125,15.654 21.361,15.89 21.761,15.89 21.831,15.959 22.196,15.959 ; S2.2@21.925,23.65 20.601,22.326 19.416,22.326 18.264,21.175 17.95,21.175 R12.1@17.825,21.05 17.5,21.375 17.151,21.375 16.702,21.823 ; v1(23.01,15.824) 23.123,15.824 23.321,15.625 23.843,15.625 C20.1@23.85,15.632 ; C32.1@27.875,4.304 C32.1@27.875,4.325 27.923,4.277 v1(27.923,3.713) v1@28.099,3.713 ; U5.17@28.24,9.289 28.25,9.279 28.25,9.125 ; v1(29.1,1.74) 29.1,1.85 29.35,2.1 X3.4@29.35,3.025 ; 16.702,21.823 16.625,21.901 16.734,22.01 v1@16.889,22.01 ; 16.702,21.823 v1@16.889,22.01
  Bottom Layer w0.3: TP23.1@9.425,2.475 9.425,2.286 9.975,1.736 S1.2@9.975,1.35 ; U5.33@28.89,17.44 28.92,17.41 28.92,16.76 U5.65@30.9,14.78 U5.65@32.64,13.04 ; X3.2@33.05,5.225 33.225,5.225 33.7,5.7 33.7,6.36 v1(33.75,6.41) ; C37.1@34.95,3.025 35.1,2.875 v1(35.1,1.675) ; C26.2@36.109,18.375 36.219,18.375 36.525,18.681 36.525,18.955 36.87,19.3 37.399,19.3 37.575,19.476 J5.5@37.575,20.475 ; v1(36.95,1.725) 36.95,2.968 C38.1@36.975,2.993
  Bottom Layer w0.4: v3(6.3,16.825) v3(7.3,16.825) ; v3(6.3,17.725) v3(7.3,17.725) ; C16.2@19.425,7.675 19.457,7.643 19.457,7.189 v1(19.489,7.157) ; U5.65@32.64,13.04 U5.65@34.38,14.78 34.407,14.78 34.993,15.366 35.61,15.366 36.219,15.974 v1(36.278,15.974) ; C26.2@36.109,18.375 36.36,18.124 36.36,17.47 U5.48@36.39,17.44 36.39,16.19 36.388,16.188 36.388,16.144 36.3,16.056 v1@36.256,16.056 ; C29.1@38.025,16.45 38.075,16.5 38.2,16.5 38.708,17.008 38.708,17.233 v1(38.75,17.275)
  Bottom Layer w0.5: J2.2@3.215,19.1 4.225,19.1 4.3,19.175 4.357,19.175 4.65,19.468 4.65,19.65 5.425,20.425 5.425,20.45 ; v3(6.3,18.625) v3(7.3,18.625) ; C25.2@26.375,7.634 26.393,7.617 27.277,7.617 v1(27.294,7.599) 27.317,7.622 27.317,8.217 C28.1@27.4,8.3 27.425,8.3 27.7,8.575 27.741,8.575 28.25,9.084 28.25,9.125
  other v1: 25,1.3 30.6,1.3 34.1,1.3 24.65,2 8.65,4.675 35.85,4.8 24.3,5.5 8.625,6.475 8.675,7.7 2.91,14.506 4.74,15.99 8.2,23.7 8.9,23.7
HFXIN: C34.2 U5.9 X3.3 | length 7.5
  Bottom Layer w0.2: U5.9@32.39,8.64 32.39,8.107 32.338,8.055 32.338,6.611 32,6.273 32,4.496 32.35,4.146 32.35,3.55 32.875,3.025 32.704,2.854 C34.2@32.704,1.75
HFXOUT: R26.2 U5.10 | length 2.7
  Bottom Layer w0.2: R26.2@30.925,6.425 31.141,6.425 31.89,7.174 U5.10@31.89,8.64
JTAG.T\R\S\T\: J4.37 U4.4 | length 12.1
  Top Layer w0.2: J4.37@22.6,4.9 22.65,4.95 22.65,5.724 23.075,6.149 23.075,8.075 23.075,9.308 23.45,9.683 23.45,10.42 23.23,10.64 23.23,11.12 v1(23.15,11.2)
  Bottom Layer w0.2: U4.4@18.125,11.925 18.5,11.925 18.595,11.925 18.645,11.975 19.876,11.975 20.451,11.4 22.484,11.4 22.604,11.28 23.07,11.28 v1(23.15,11.2)
JTAG.TCK: J4.29 U4.8 | length 8.3
  Top Layer w0.2: v1(19.251,10.275) 19.251,10.21 19.96,9.5 20.562,9.5 21.65,8.412 21.65,6.704 20.65,5.704 20.65,4.95 J4.29@20.6,4.9
  Bottom Layer w0.2: U4.8@18.125,10.325 19.201,10.325 v1(19.251,10.275)
JTAG.TDI: J4.35 U4.5 | length 11.4
  Top Layer w0.2: J4.35@22.1,4.9 22.15,4.95 22.15,5.719 22.725,6.294 22.725,9.483 23.1,9.858 23.1,10.275 22.615,10.76 22.264,10.76 v1(22.183,10.84)
  Bottom Layer w0.2: U4.5@18.125,11.525 18.69,11.525 18.79,11.625 19.731,11.625 20.307,11.05 22.025,11.05 22.167,10.908 22.167,10.857 v1(22.183,10.84)
JTAG.TDO: J4.33 U4.6 | length 10.1
  Top Layer w0.2: J4.33@21.6,4.9 21.65,4.95 21.65,5.714 22.35,6.414 22.35,9.589 v1(21.69,10.249)
  Bottom Layer w0.2: U4.6@18.125,11.125 18.785,11.125 18.845,11.185 19.676,11.185 20.162,10.7 21.532,10.7 21.753,10.478 21.753,10.313 v1(21.69,10.249)
JTAG.TMS: J4.31 U4.7 | length 9.1
  Top Layer w0.2: v1(20.19,10.062) 20.192,10.06 20.86,10.06 21.303,9.617 21.303,9.253 22,8.557 22,6.559 21.15,5.709 21.15,4.95 J4.31@21.1,4.9
  Bottom Layer w0.2: U4.7@18.125,10.725 18.88,10.725 18.99,10.835 19.483,10.835 20.19,10.128 v1(20.19,10.062)
JTAG_RESET: C35.1 PJ1.7 R29.2 U5.12 | length 15.5
  Top Layer w0.2: v1@26.405,2.384 26.405,2.145 26.798,1.752 R29.2@26.798,1.75 ; v1(26.44,2.384) 26.44,2.46 26.325,2.575 26.405,2.655 26.405,2.805 26.95,3.35 C35.1@26.95,3.371 ; v1(29.156,6.481) 29.156,6.316 29.143,6.303 30.946,4.5 31.454,4.5 31.65,4.696 31.65,5.3 PJ1.7@31.7,5.35
  Bottom Layer w0.2: v1(26.44,2.384) 26.44,2.497 26.325,2.612 26.325,4.925 27.315,5.915 27.908,5.915 28.093,6.1 28.637,6.1 29.004,6.467 29.142,6.467 v1(29.156,6.481) ; v1@29.119,6.481 29.653,7.015 30.147,7.015 30.584,7.452 30.76,7.628 30.76,8.035 30.89,8.165 U5.12@30.89,8.64
JTAG_TCK: PJ1.3 U5.16 | length 13.5
  Top Layer w0.2: v1(26.55,6.2) 27.5,5.25 27.88,5.25 30.055,3.075 32.029,3.075 33.65,4.696 33.65,5.3 PJ1.3@33.7,5.35
  Bottom Layer w0.2: v1(26.55,6.2) 27.389,7.039 27.526,7.039 28.1,7.613 28.1,8.072 28.468,8.44 28.87,8.44 28.89,8.46 U5.16@28.89,8.64
JTAG_TDI: PJ1.6 U5.14 | length 8.4
  Top Layer w0.2: v1(29.781,7.936) 28.475,6.629 28.475,6.3 30.625,4.15 31.604,4.15 32.15,4.696 32.15,5.3 PJ1.6@32.2,5.35
  Bottom Layer w0.2: v1(29.781,7.936) 29.87,8.024 29.87,8.62 U5.14@29.89,8.64
JTAG_TDO: PJ1.5 U5.13 | length 12
  Top Layer w0.2: v1(27.676,6.475) 27.552,6.6 27.525,6.6 30.325,3.8 31.749,3.8 31.912,3.963 31.917,3.963 32.65,4.696 32.65,5.3 PJ1.5@32.7,5.35
  Bottom Layer w0.2: v1(27.676,6.475) 27.552,6.6 27.531,6.6 28.425,6.6 29.2,7.375 30.013,7.375 30.234,7.597 30.39,7.752 U5.13@30.39,8.64
JTAG_TEST: PJ1.8 U5.11 | length 3.4
  Top Layer w0.2: v1(31.144,7.22) 31.2,7.164 PJ1.8@31.2,5.35
  Bottom Layer w0.2: v1(31.144,7.22) 31.144,7.739 31.37,7.965 31.37,8.62 U5.11@31.39,8.64
JTAG_TMS: PJ1.4 U5.15 | length 12.1
  Top Layer w0.2: v1(28.66,7.84) 27.859,7.039 27.448,7.039 27.116,6.707 27.116,6.243 27.76,5.6 28.025,5.6 30.175,3.45 31.904,3.45 33.15,4.696 33.15,5.3 PJ1.4@33.2,5.35
  Bottom Layer w0.2: v1(28.66,7.84) 28.74,7.92 28.944,7.92 29.37,8.346 29.37,8.62 U5.15@29.39,8.64
LED_1: R23.1 U4.28 | length 11.5
  Top Layer w0.2: R23.1@9.25,2.975 ccw(c9.325,2.975) 9.325,2.9 10.275,2.9 10.565,2.61 11.032,2.61 11.36,2.938 11.36,3.865 11.35,3.875 11.35,4.399 10.175,5.574 10.175,6.308 10.14,6.343 10.14,7.582 10.236,7.678 10.236,7.937 v1(10.317,8.018)
  Bottom Layer w0.2: v1(10.317,8.018) 10.363,8.064 10.363,8.272 10.413,8.322 10.413,9.317 10.741,9.645 11.19,9.645 11.42,9.875 11.8,9.875 11.85,9.925 U4.28@12.225,9.925
LED_MSP430: R27.1 U5.26 | length 1.5
  Top Layer w0.2: R27.1@26.85,13.975 26.925,13.9 v1(27.39,13.9)
  Bottom Layer w0.2: v1(27.39,13.9) 27.664,13.9 27.753,13.81 28.22,13.81 U5.26@28.24,13.79
LFXIN: C38.2 U5.6 X4.1 | length 6.6
  Bottom Layer w0.2: U5.6@33.89,8.64 33.91,8.62 33.91,8.346 35.929,6.328 36.748,6.328 37.194,5.881 X4.1@37.194,5.475 36.975,5.256 C38.2@36.975,3.95
LFXOUT: C37.2 U5.7 X4.2 | length 5.3
  Bottom Layer w0.2: U5.7@33.39,8.64 33.41,8.62 33.41,8.207 34.756,6.861 X4.2@34.756,5.475 34.95,5.281 C37.2@34.95,3.982
MISO: J4.23 TP9.1 U4.11 U5.20 | length 24.1
  Top Layer w0.2: J4.23@19.1,4.9 19.15,4.95 19.15,5.643 19.2,5.693 19.2,5.754 19.696,6.25 20.1,6.25 20.95,7.1 20.95,7.932 20.407,8.475 20.3,8.475 v1@20.19,8.475 ; v1(20.19,8.58) v1@20.19,8.475 ; TP9.1@21.225,12.625 21.225,11.775 20.75,11.3 18.989,11.3 18.341,10.652 18.341,9.493 19.359,8.475 v1@20.19,8.475
  Bottom Layer w0.2: U4.11@18.125,9.125 18.595,9.125 19.195,8.525 20.135,8.525 v1(20.19,8.58) ; v1@20.25,8.525 20.3,8.475 20.414,8.475 20.739,8.8 22.933,8.8 24.922,10.789 U5.20@28.24,10.789
MOSI: J4.21 TP8.1 U4.12 U5.19 | length 22.2
  Top Layer w0.2: J4.21@18.6,4.9 18.6,5.5 18.7,5.6 18.7,5.754 19.546,6.6 19.9,6.6 20.335,7.035 20.335,7.571 20.39,7.626 20.316,7.7 19.625,7.7 17.991,9.334 17.991,11.191 TP8.1@19.375,12.575
  Bottom Layer w0.2: U4.12@18.125,8.725 18.5,8.725 19.05,8.175 19.804,8.175 20.115,7.863 20.115,7.775 v1(20.19,7.7) ; v1@20.246,7.756 20.301,7.7 20.39,7.7 21,8.31 21,8.333 21.117,8.45 23.078,8.45 24.917,10.289 U5.19@28.24,10.289
NetB1_1: B1.1 L6.2 | length 6.3
  Bottom Layer w1: B1.1@1.84,1.975 6.4,1.975 ; 6.44,1.975 6.4,1.975 ; L6.2@7.4,3.1 7.4,2.975 cw(c6.4,2.975) 6.4,1.975
NetC1_1: C1.1 FB1.1 L1.2 R4.2 TP1.1 | length 9
  Top Layer w0.2: R4.2@22.15,22.275 22.185,22.31 22.747,22.31 v1(22.781,22.345) ; v1(23.052,19.91) 23.44,19.91 C1.1@23.51,19.98 ; TP1.1@23.575,16.6 23.575,18.435 L1.2@23.51,18.5 C1.1@23.51,19.98 ; FB1.1@24.475,19.875 23.705,19.875 23.555,20.025 C1.1@23.51,19.98
  Bottom Layer w0.2: v1(22.781,22.345) 22.895,22.345 23.204,22.035 23.415,22.035 23.85,21.6 23.85,20.707 v1(23.052,19.91)
NetC4_1: C4.1 FB2.1 L2.2 TP7.1 U2.A2 | length 5.5
  Top Layer w0.2: L2.2@13.875,16.4 14.245,16.03 15,16.03 15.25,15.78 C4.1@15.25,15.75 15.25,15.7 15.5,15.95 15.5,16.567 15.75,16.817 U2.A2@15.75,16.825 ; TP7.1@14.15,14.075 14.217,14.142 14.217,14.875 14.5,15.158 FB2.1@14.5,15.65
  Top Layer w0.3: FB2.1@14.5,15.65 15.2,15.65 C4.1@15.25,15.7
NetC5_2: C5.2 J1.Shell R15.1 | length 10.8
  Top Layer w0.2: v1(0.925,21.51) 0.925,21.925 1.5,22.5 1.5,19.7 1.5,17.3 J1.Shell@1.5,14.5
  Bottom Layer w0.2: v1(0.925,21.51) 1.585,21.51 R15.1@1.65,21.575 1.7,21.525 C5.2@2.475,21.525